# Altium PCB 封装.PcbDoc
Units mil, origin at the board's own origin, x right, y up, seen from the top; angles counter-clockwise.
Board outline 6000 x 4000 mil, 2 copper layers (Top Layer, Bottom Layer); 2 components, 0 nets, 84 pads, 0 vias.
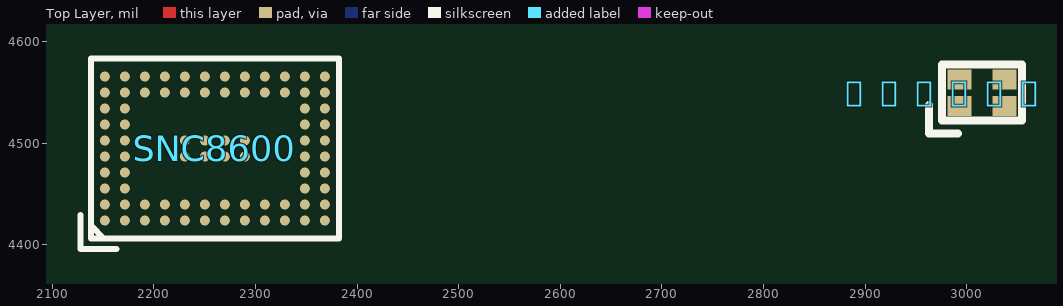
[diagram p0: Top Layer view]
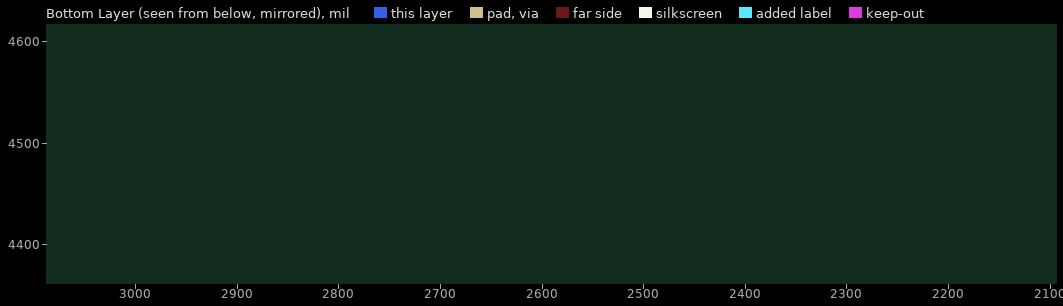
[diagram p1: Bottom Layer view, seen from below]

## Layer stack, top to bottom
Top Solder: solder mask 0.4, Solder Resist, Dk 3.5
Top Layer: signal copper 1.4
Dielectric 1: dielectric 12.6, FR-4, Dk 4.8
Bottom Layer: signal copper 1.4
Bottom Solder: solder mask 0.4, Solder Resist, Dk 3.5

## Board outline
1000,1000 7000,1000 7000,5000 1000,5000

## Design rules (kind name [scope] priority, off if disabled: settings)
Clearance [All] p1: gap=10
PolygonConnect [All] p1: connectstyle=Relief reliefconductorwidth=10 reliefentries=4 polygonreliefangle="90 Angle" airgapwidth=10
RoutingVias [All] p1: holewidth=28 width=50 viastyle="Through Hole" minholewidth=28 minwidth=50 maxholewidth=28 maxwidth=50
SolderMaskExpansion [All] p1: expansion=4
UnpouredPolygon [All] p1: allowunpoured=FALSE
Width [All] p1: maxlimit=10 minlimit=10 preferedwidth=10
29 further rules are at their usual default settings.

## Components (designator, comment, footprint, x,y, rotation, side; value= is the part's Value field where it differs from the comment)
"SF1612 晶振" "Comment" SF1612 3015,4550 r0 top
SNC8600 "Comment" SNC8600 2260,4495 r0 top

## Footprints (in the part's own frame and the unit in brackets; to place one, negate y for a bottom-side part, rotate by r counter-clockwise, add the part's x,y. Pads: shape width x height; smd on the part's side, far side on the other; paste and mask are expansions set on the pad)
SF1612 [mm]
  rect 0.6x0.5 smd: 1(-0.56,-0.33) 2(0.56,-0.33) 3(0.56,0.33) 4(-0.56,0.33)
  silkscreen extent -1.32,-1.02 1,0.7
SNC8600 [mm]
  round 0.25 smd: A1(-2.75,-1.8) A2(-2.25,-1.8) A3(-1.75,-1.8) A4(-1.25,-1.8) A5(-0.75,-1.8) A6(-0.25,-1.8) A7(0.25,-1.8) A8(0.75,-1.8) A9(1.25,-1.8) A10(1.75,-1.8) A11(2.25,-1.8) A12(2.75,-1.8) B1(-2.75,-1.4) B2(-2.25,-1.4) B3(-1.75,-1.4) B4(-1.25,-1.4) B5(-0.75,-1.4) B6(-0.25,-1.4) B7(0.25,-1.4) B8(0.75,-1.4) B9(1.25,-1.4) B10(1.75,-1.4) B11(2.25,-1.4) B12(2.75,-1.4) C1(-2.75,-1) C2(-2.25,-1) C11(2.25,-1) C12(2.75,-1) D1(-2.75,-0.6) D2(-2.25,-0.6) D11(2.25,-0.6) D12(2.75,-0.6) E1(-2.75,-0.2) E2(-2.25,-0.2) E5(-0.75,-0.2) E6(-0.25,-0.2) E7(0.25,-0.2) E8(0.75,-0.2) E11(2.25,-0.2) E12(2.75,-0.2) F1(-2.75,0.2) F2(-2.25,0.2) F5(-0.75,0.2) F6(-0.25,0.2) F7(0.25,0.2) F8(0.75,0.2) F11(2.25,0.2) F12(2.75,0.2) G1(-2.75,0.6) G2(-2.25,0.6) G11(2.25,0.6) G12(2.75,0.6) H1(-2.75,1) H2(-2.25,1) H11(2.25,1) H12(2.75,1) J1(-2.75,1.4) J2(-2.25,1.4) J3(-1.75,1.4) J4(-1.25,1.4) J5(-0.75,1.4) J6(-0.25,1.4) J7(0.25,1.4) J8(0.75,1.4) J9(1.25,1.4) J10(1.75,1.4) J11(2.25,1.4) J12(2.75,1.4) K1(-2.75,1.8) K2(-2.25,1.8) K3(-1.75,1.8) K4(-1.25,1.8) K5(-0.75,1.8) K6(-0.25,1.8) K7(0.25,1.8) K8(0.75,1.8) K9(1.25,1.8) K10(1.75,1.8) K11(2.25,1.8) K12(2.75,1.8)
  silkscreen extent -3.36,-2.51 3.1,2.25

## Nets (pads, with @x,y where several pads share a name; then routed paths per layer and width w, separated by ;. In a path a pad name is that pad's centre, name@x,y a point inside that pad or via, vN(x,y) a via of type N, cw(c..) or ccw(c..) an arc to the next point about the centre after c; other vN are vias at no path point)
pads on no net: "SF1612 晶振.1" "SF1612 晶振.2" "SF1612 晶振.3" "SF1612 晶振.4" SNC8600.A1 SNC8600.A2 SNC8600.A3 SNC8600.A4 SNC8600.A5 SNC8600.A6 SNC8600.A7 SNC8600.A8 SNC8600.A9 SNC8600.A10 SNC8600.A11 SNC8600.A12 SNC8600.B1 SNC8600.B2 SNC8600.B3 SNC8600.B4 SNC8600.B5 SNC8600.B6 SNC8600.B7 SNC8600.B8 SNC8600.B9 SNC8600.B10 SNC8600.B11 SNC8600.B12 SNC8600.C1 SNC8600.C2 SNC8600.C11 SNC8600.C12 SNC8600.D1 SNC8600.D2 SNC8600.D11 SNC8600.D12 SNC8600.E1 SNC8600.E2 SNC8600.E5 SNC8600.E6 SNC8600.E7 SNC8600.E8 SNC8600.E11 SNC8600.E12 SNC8600.F1 SNC8600.F2 SNC8600.F5 SNC8600.F6 SNC8600.F7 SNC8600.F8 SNC8600.F11 SNC8600.F12 SNC8600.G1 SNC8600.G2 SNC8600.G11 SNC8600.G12 SNC8600.H1 SNC8600.H2 SNC8600.H11 SNC8600.H12 SNC8600.J1 SNC8600.J2 SNC8600.J3 SNC8600.J4 SNC8600.J5 SNC8600.J6 SNC8600.J7 SNC8600.J8 SNC8600.J9 SNC8600.J10 SNC8600.J11 SNC8600.J12 SNC8600.K1 SNC8600.K2 SNC8600.K3 SNC8600.K4 SNC8600.K5 SNC8600.K6 SNC8600.K7 SNC8600.K8 SNC8600.K9 SNC8600.K10 SNC8600.K11 SNC8600.K12